# EAGLE board sensore-linea-multipli (EAGLE 9.3.0)
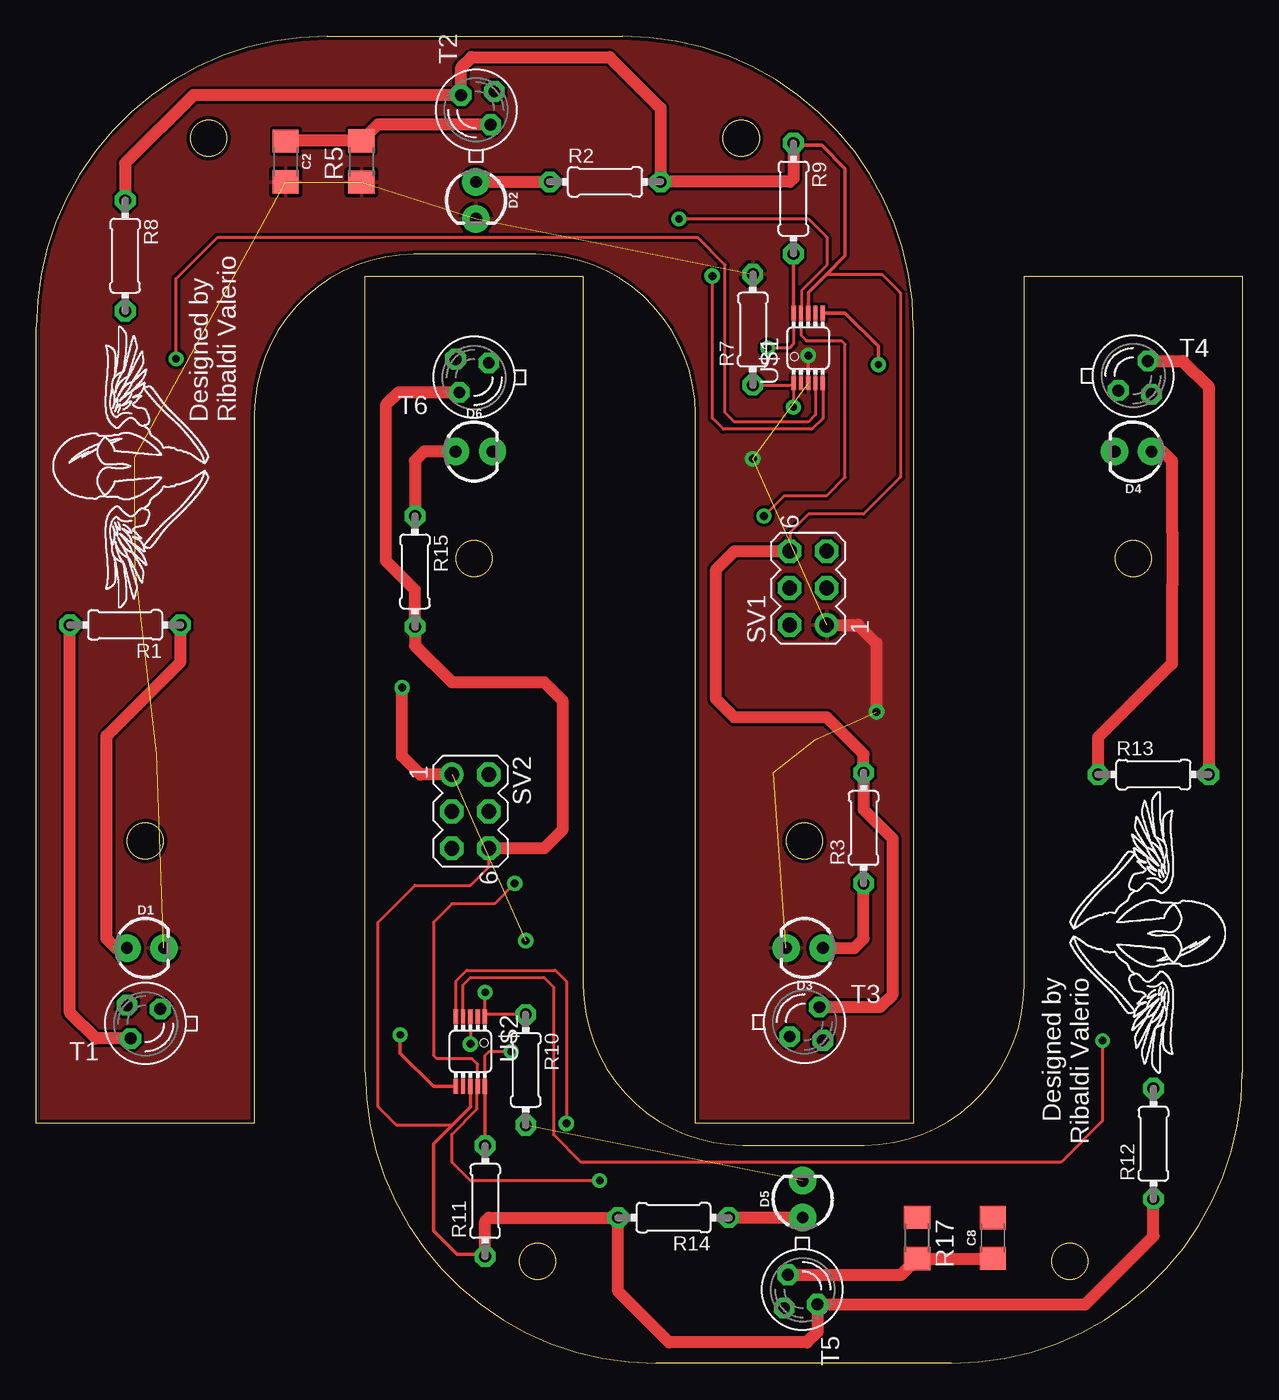
[diagram p0: board, top side]
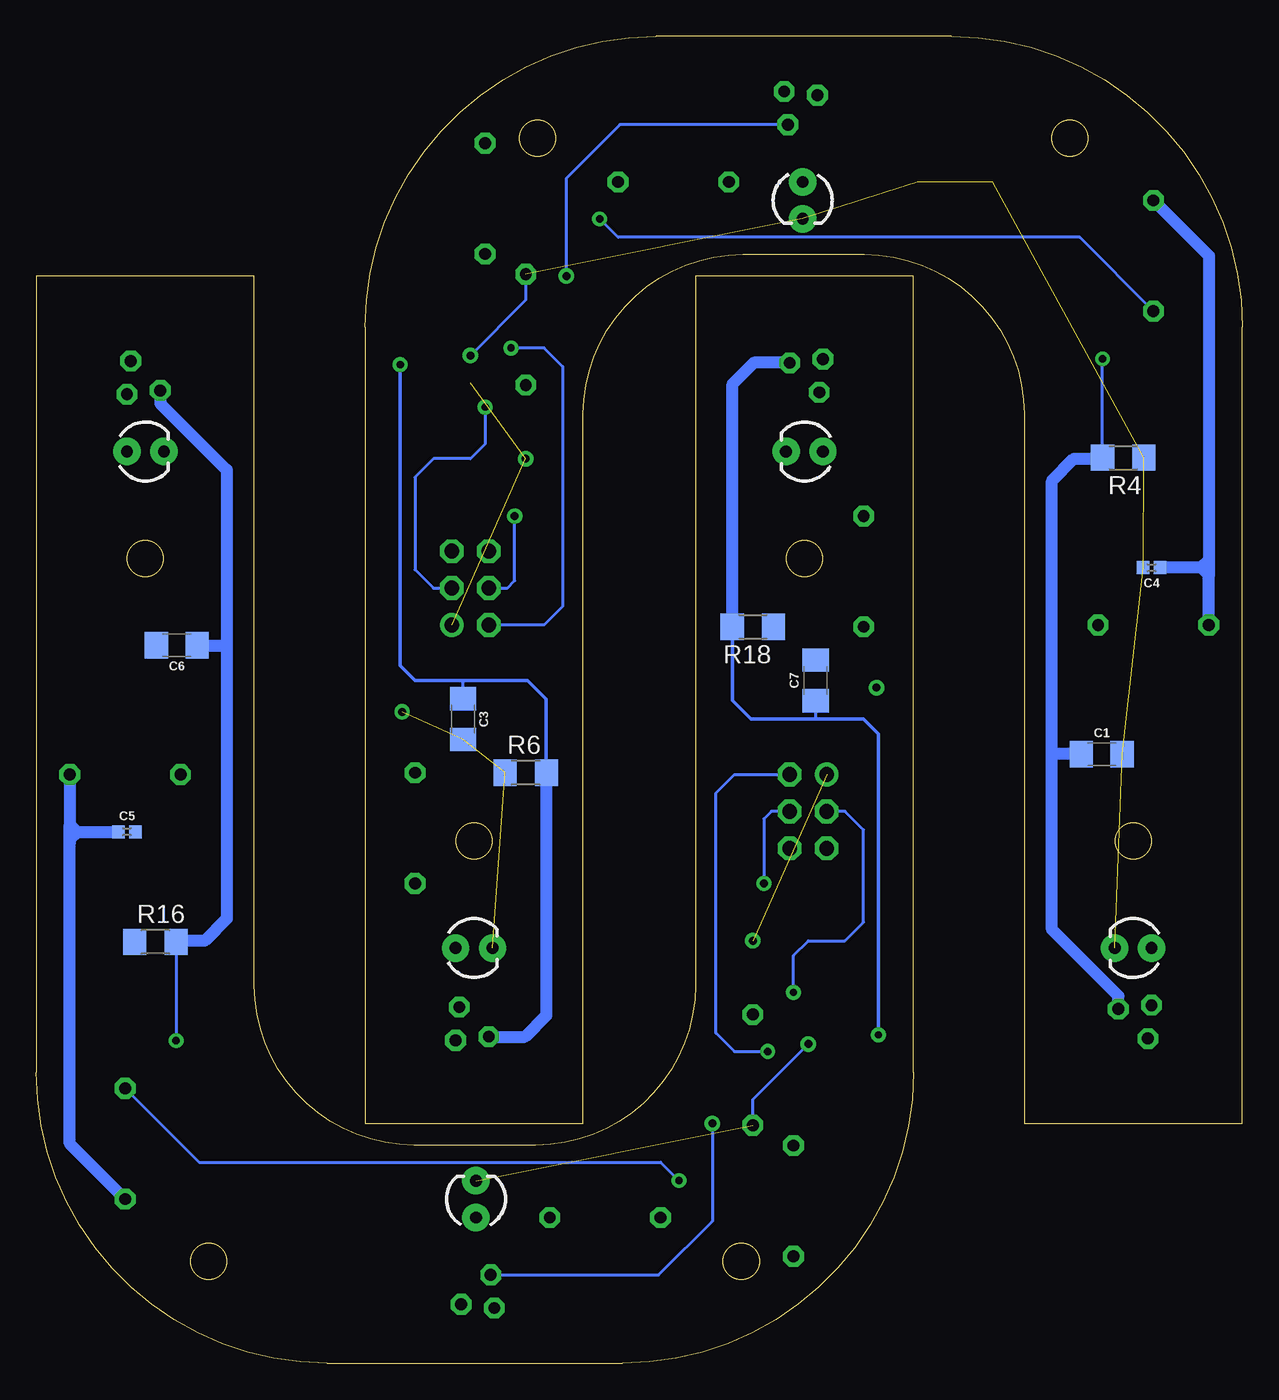
[diagram p1: board, bottom side, seen from below]

Size 82.96 x 91.27 mm. Coordinates in mm from the lower left corner, seen from the top.
Outline: 26,76.27 arc90 15,65.27 15,16.49 0,16.49 0,71.27 arc-90 20,91.27 40.34,91.27 arc-90 60.34,71.27 60.34,16.49 45.34,16.49 45.34,65.27 arc90 34.34,76.27 26,76.27
Outline: 56.96,15 arc90 67.96,26 67.96,74.78 82.96,74.78 82.96,20 arc-90 62.96,0 42.62,0 arc-90 22.62,20 22.62,74.78 37.62,74.78 37.62,26 arc90 48.62,15 56.96,15
Outline: circle at 11.86,84.27 radius 1.25
Outline: circle at 48.49,84.27 radius 1.25
Outline: circle at 7.5,35.92 radius 1.25
Outline: circle at 52.84,35.92 radius 1.25
Outline: circle at 71.1,7 radius 1.25
Outline: circle at 34.47,7 radius 1.25
Outline: circle at 75.46,55.35 radius 1.25
Outline: circle at 30.12,55.35 radius 1.25
Copper layers (1*16): Top 0.035mm / dielectric 1.5mm / Bottom 0.035mm
Design rules "SparkFun": minimum track width 8mil, minimum drill 20mil, track to track 8mil, track to pad 8mil, pad to pad 8mil, via to via 8mil, smd to smd 8mil, copper to edge 10mil, drill to drill 8mil, minimum pad ring 12mil, minimum via ring 10mil, stop-mask expansion 4mil, vias tented up to drill 25mil, thermal gap 10mil

## Footprints (pad centres in the part's own frame; a part is rotated, then mirrored left to right if it is on the bottom)
1206 = smd 1.6 x 1.8: 1 -1.4,0; 2 1.4,0
0402 = smd 0.85 x 0.9: 1 -0.58,0; 2 0.58,0
LED_3MM = drill 0.813 pad 1.88: A -1.27,0; K 1.27,0
0204/7 = drill 0.813 octagon: 1 -3.81,0; 2 3.81,0
R1206 = smd 1.6 x 1.803: 1 -1.422,0; 2 1.422,0
MA03-2 = drill 1.016: 1 -2.54,-1.27 | drill 1.016 octagon: 2 -2.54,1.27; 3 0,-1.27; 4 0,1.27; 5 2.54,-1.27; 6 2.54,1.27
BP103 = drill 0.813 octagon: B 1.27,-1.27; C 1.016,1.016; E -1.016,-1.016
MSOP10_0.5 = smd 0.3 x 1.02: 1 -1,-2.4; 2 -0.5,-2.4; 3 0,-2.4; 4 0.5,-2.4; 5 1,-2.4; 6 1,2.4; 7 0.5,2.4; 8 0,2.4; 9 -0.5,2.4; 10 -1,2.4

## Placement (x,y rotation side)
C1  1.0uF  [1206]  9.67,41.89 0 bottom
C2  1.0uF  [1206]  17.16,82.66 270 top
C3  1.0uF  [1206]  53.61,44.3 270 bottom
C4  1.0uF  [0402]  6.24,54.72 180 bottom
C5  1.0uF  [0402]  76.72,36.56 0 bottom
C6  1.0uF  [1206]  73.29,49.38 180 bottom
C7  1.0uF  [1206]  29.35,46.97 90 bottom
C8  1.0uF  [1206]  65.8,8.62 90 top
D1  [LED_3MM]  7.51,28.55 0 top
D2  [LED_3MM]  30.24,79.99 270 top
D3  [LED_3MM]  52.85,28.55 180 top
D4  [LED_3MM]  75.45,62.72 180 top
D5  [LED_3MM]  52.72,11.28 90 top
D6  [LED_3MM]  30.11,62.72 0 top
R1  180  [0204/7]  6.11,50.78 180 top
R2  180  [0204/7]  39.13,81.26 0 top
R3  180  [0204/7]  56.91,36.81 90 top
R4  10k  [R1206]  8.19,62.29 180 bottom
R5  10k  [R1206]  22.37,82.66 90 top
R6  10k  [R1206]  49.29,40.62 0 bottom
R7  10K  [0204/7]  49.29,71.1 90 top
R8  10K  [0204/7]  6.11,76.18 270 top
R9  10K  [0204/7]  52.08,80.12 270 top
R10  10K  [0204/7]  33.67,20.17 270 top
R11  10K  [0204/7]  30.87,11.16 90 top
R12  10K  [0204/7]  76.85,15.09 90 top
R13  180  [0204/7]  76.85,40.49 0 top
R14  180  [0204/7]  43.83,10.01 180 top
R15  180  [0204/7]  26.05,54.46 270 top
R16  10k  [R1206]  74.77,28.99 0 bottom
R17  10k  [R1206]  60.59,8.62 270 top
R18  10k  [R1206]  33.67,50.65 180 bottom
SV1  [MA03-2]  53.1,53.32 90 top
SV2  [MA03-2]  29.86,37.95 270 top
T1  BP103  [BP103]  7.51,23.35 180 top
T2  BP103  [BP103]  30.24,86.21 90 top
T3  BP103  [BP103]  52.85,23.47 0 top
T4  BP103  [BP103]  75.45,67.92 0 top
T5  BP103  [BP103]  52.72,5.06 270 top
T6  BP103  [BP103]  30.11,67.8 180 top
U$1  ADS1015IDGT  [MSOP10_0.5]  53.1,69.83 0 top
U$2  ADS1015IDGT  [MSOP10_0.5]  29.86,21.44 180 top

## Library data of the parts
C1-C3 C6-C8 = SparkFun-Capacitors; PROD_ID: CAP-10009
C4 C5 = SparkFun-Capacitors; PROD_ID: CAP-12417
D1-D6 = SparkFun-LED; PROD_ID: DIO-08794
R1-R6 R13-R18 = rcl; SPICEPREFIX: R
R7-R12 = resistor
SV1 SV2 = con-lstb; OC_FARNELL: unknown; OC_NEWARK: unknown
T1-T6 = opto-trans-siemens; OC_FARNELL: unknown; OC_NEWARK: unknown
U$1 U$2 = bt_adc

## Nets
ADDR: R7.1 SV1.3 U$1.1
ADDR1: R10.1 SV2.3 U$2.1
GND: C1.2 C2.2 C3.2 C4.2 D1.K D2.K D3.K R4.1 R5.1 R6.1 R7.2 SV1.1 U$1.3
GND1: C5.2 C6.2 C7.2 C8.2 D4.K D5.K D6.K R10.2 R16.1 R17.1 R18.1 SV2.1 U$2.3
N$1: D4.A R13.1
N$2: D1.A R1.1
N$3: D2.A R2.1
N$4: D3.A R3.1
N$5: D5.A R14.1
N$6: D6.A R15.1
OUT1: C1.1 R4.2 T1.E U$1.4
OUT2: C2.1 R5.2 T2.E U$1.5
OUT3: C3.1 R6.2 T3.E U$1.6
OUT4: C6.1 R16.2 T4.E U$2.4
OUT5: C8.1 R17.2 T5.E U$2.5
OUT6: C7.1 R18.2 T6.E U$2.6
SCL: R9.2 SV1.2 U$1.10
SCL1: R11.2 SV2.2 U$2.10
SDA: R8.2 SV1.4 U$1.9
SDA1: R12.2 SV2.4 U$2.9
VCC: C4.1 R1.2 R2.2 R3.2 R8.1 R9.1 SV1.6 T1.C T2.C T3.C U$1.8
VCC1: C5.1 R11.1 R12.1 R13.2 R14.2 R15.2 SV2.6 T4.C T5.C T6.C U$2.8

## Tracks (layer width: path | path; a pad name or v marks a point on that pad's centre or on a via)
ADDR  (via drill 0.51)
  Top 0.203: R7.1 51.96,67.29 U$1.1 52.1,65.78 v52.08,65.77
  Bottom 0.203: v52.08,65.77 52.08,63.23 53.1,62.21 55.64,62.21 56.91,60.94 56.91,54.59 55.64,53.32 SV1.3
ADDR1  (via drill 0.51)
  Top 0.203: R10.1 31,23.98 U$2.1 30.86,25.49 v30.87,25.51
  Bottom 0.203: v30.87,25.51 30.87,28.05 29.86,29.06 27.32,29.06 26.05,30.33 26.05,36.68 27.32,37.95 SV2.3
GND  (via drill 0.55)  (12 unrouted)
  Top 0.203: U$1.3 v53.1,69.32
  Top 0.813: SV1.1 56.53,50.78 57.8,49.51 v57.8,44.81
  Bottom 0.203: v53.1,69.32 49.29,73.13 R7.2
  other vias: 49.29,62.21
  pour Top: -0.11,16.24 15.25,16.24 15.25,18.27 15.25,65.64 arc-89 25.54,76.05 arc-1 34.56,76.05 arc-89 45.1,65.38 45.1,16.24 46.62,16.24 60.59,16.24 60.59,18.39 60.59,71.1 arc87 41.04,91.55 19.57,91.55 arc90 -0.24,71.61 -0.24,16.24
  pour Top: 22.62,74.91 37.86,74.91 37.86,73.89 37.86,25.89 arc90 48.53,15.22 56.91,15.22 arc89 67.83,26.01 67.83,74.91 83.07,74.91 83.2,74.91 83.2,20.17 arc-90 63.01,-0.15 42.81,-0.15 arc-89 22.49,19.66 22.49,74.91
GND1  (via drill 0.55)  (2 unrouted)
  Top 0.203: U$2.3 v29.86,21.95
  Top 0.813: SV2.1 26.43,40.49 25.16,41.76 v25.16,46.46
  Bottom 0.203: v29.86,21.95 33.67,18.14 R10.2
  other vias: 33.67,29.06
N$1
  Top 0.813: D4.A 77.48,62.72 78.12,62.08 78.12,57.2 78.13,57.19 78.13,53.51 78.12,53.5 78.12,48.11 73.04,43.03 R13.1
N$2
  Top 0.813: D1.A 5.48,28.55 4.84,29.19 4.84,34.07 4.83,34.08 4.83,37.76 4.84,37.78 4.84,43.16 9.92,48.24 R1.1
N$3
  Top 0.813: D2.A R2.1
N$4
  Top 0.813: R3.1 56.91,29.19 56.28,28.55 D3.A
N$5
  Top 0.813: D5.A R14.1
N$6
  Top 0.813: R15.1 26.05,62.08 26.68,62.72 D6.A
OUT1  (via drill 0.51)
  Top 0.203: U$1.4 53.6,65.25 53.1,64.75 48.02,64.75 47.39,65.38 47.39,75.54 45.48,77.45 12.46,77.45 9.61,74.6 v9.61,69.09
  Bottom 0.203: v9.61,69.09 | R4.2 v9.61,69.09
  Bottom 0.813: T1.E 8.52,25.25 13.09,29.82 13.09,41.89 | 13.09,41.89 13.09,60.69 11.57,62.21 9.69,62.21 R4.2 | C1.1 13.09,41.89
OUT2  (via drill 0.55)
  Top 0.203: U$1.5 54.1,64.99 53.35,64.24 47.26,64.24 46.5,65 v46.5,74.78
  Top 0.813: T2.E 23.48,85.2 R5.2 17.18,84.08
  Top 1.016: 17.18,84.08 C2.1
  Bottom 0.203: v46.5,74.78 46.5,81.51 42.81,85.2 T2.E
OUT3  (via drill 0.51)
  Top 0.254: U$1.6 55.63,72.23 55.64,72.24 57.93,69.96 v57.93,68.69
  Bottom 0.203: C3.1 53.61,46.97
  Bottom 0.254: R6.2 47.89,40.64 47.89,45.7 49.16,46.97 53.61,46.97 56.91,46.97 57.93,47.99 v57.93,68.69
  Bottom 0.813: 47.89,40.64 47.89,23.92 49.36,22.46 T3.E
OUT4  (via drill 0.51)
  Top 0.203: U$2.4 29.36,26.02 29.86,26.52 34.94,26.52 35.57,25.89 35.57,15.73 37.48,13.82 70.5,13.82 73.34,16.67 v73.34,22.18
  Bottom 0.203: v73.34,22.18 | R16.2 v73.34,22.18
  Bottom 0.813: T4.E 74.44,66.02 69.86,61.45 69.86,49.38 | 69.86,49.38 69.86,30.59 71.39,29.06 73.27,29.06 R16.2 | C6.1 69.86,49.38
OUT5  (via drill 0.55)
  Top 0.203: U$2.5 28.86,26.28 29.61,27.03 35.7,27.03 36.46,26.27 v36.46,16.49
  Top 0.813: T5.E 59.48,6.08 R17.2 65.78,7.19
  Top 1.016: 65.78,7.19 C8.1
  Bottom 0.203: v36.46,16.49 36.46,9.76 40.15,6.08 T5.E
OUT6  (via drill 0.51)
  Top 0.254: U$2.6 27.33,19.04 27.32,19.03 25.03,21.32 v25.03,22.59
  Bottom 0.203: C7.1 29.35,44.3
  Bottom 0.254: R18.2 35.07,50.63 35.07,45.57 33.8,44.3 29.35,44.3 26.05,44.3 25.03,43.29 v25.03,22.59
  Bottom 0.813: 35.07,50.63 35.07,67.35 33.6,68.81 T6.E
SCL  (via drill 0.51)
  Top 0.203: U$1.10 52.1,70.1 51.83,69.83 v50.31,69.83
  Top 0.254: R9.2 52.1,76.29 U$1.10
  Bottom 0.203: SV1.2 48.02,50.78 46.75,52.05 46.75,68.56 48.02,69.83 v50.31,69.83
SCL1  (via drill 0.51)
  Top 0.203: U$2.10 30.86,21.17 31.13,21.44 v32.65,21.44
  Top 0.254: R11.2 30.86,14.98 U$2.10
  Bottom 0.203: SV2.2 34.94,40.49 36.21,39.22 36.21,22.71 34.94,21.44 v32.65,21.44
SDA  (via drill 0.51, 0.55)
  Top 0.203: v50.05,58.27 51.45,59.67 54.37,59.67 55.64,60.94 55.64,70.08 55.39,70.34 52.97,70.34 52.6,70.71 U$1.9 52.65,72.27 52.65,73.8 54.37,75.52 54.37,77.45 53.1,78.72 v44.21,78.72
  Bottom 0.203: SV1.4 50.56,53.32 50.05,53.83 v50.05,58.27 | R8.2 11.19,77.45 42.94,77.45 v44.21,78.72
SDA1  (via drill 0.51, 0.55)
  Top 0.203: v32.91,33 31.51,31.6 28.59,31.6 27.32,30.33 27.32,21.19 27.57,20.93 29.99,20.93 30.36,20.56 U$2.9 30.31,19 30.31,17.48 28.59,15.75 28.59,13.82 29.86,12.55 v38.75,12.55
  Bottom 0.203: SV2.4 32.4,37.95 32.91,37.44 v32.91,33 | R12.2 71.77,13.82 40.02,13.82 v38.75,12.55
VCC
  Top 0.203: SV1.6 51.83,57.13 53.1,58.4 56.91,58.4 59.45,60.94 59.45,73.64 58.18,74.91 54.37,74.91
  Top 0.254: U$1.8 53.1,73.64 54.37,74.91 55.64,76.18 55.64,82.17 54.03,83.78 52.23,83.78 R9.1
  Top 0.813: T1.C 4.08,22.33 2.3,24.11 R1.2 | T3.C 58.03,24.49 58.92,25.38 58.92,36.07 56.91,38.08 R3.2 56.91,41.89 54.37,44.43 48.02,44.43 46.76,45.69 46.76,54.6 48.02,55.86 SV1.6 | R8.1 6.11,82.53 10.81,87.23 T2.C 29.22,89.13 29.94,89.85 39.43,89.85 42.94,86.34 R2.2 51.83,81.26 52.08,81.51 R9.1
  Bottom 0.813: R1.2 2.3,54.21 | 2.3,54.21 2.81,54.72 | 2.81,54.72 C4.1 | R8.1 2.3,76.18 2.3,55.48 2.3,55.22 | 2.3,55.22 2.3,54.21 | 2.3,55.22 2.81,54.72
VCC1
  Top 0.203: SV2.6 31.13,34.14 29.86,32.87 26.05,32.87 23.51,30.33 23.51,17.63 24.78,16.36 28.59,16.36
  Top 0.254: U$2.8 29.86,17.63 28.59,16.36 27.32,15.09 27.32,9.1 28.93,7.49 30.73,7.49 R11.1
  Top 0.813: T4.C 78.88,68.94 80.66,67.16 R13.2 | T6.C 24.93,66.78 24.04,65.89 24.04,55.2 26.05,53.19 R15.2 26.05,49.38 28.59,46.84 34.94,46.84 36.2,45.59 36.2,36.67 34.94,35.41 SV2.6 | R12.1 76.85,8.74 72.15,4.04 T5.C 53.73,2.14 53.02,1.42 43.53,1.42 40.02,4.93 R14.2 31.13,10.01 30.87,9.76 R11.1
  Bottom 0.813: R13.2 80.66,37.06 | 80.66,37.06 80.15,36.56 | 80.15,36.56 C5.1 | R12.1 80.66,15.09 80.66,35.79 80.66,36.05 | 80.66,36.05 80.66,37.06 | 80.66,36.05 80.15,36.56

## Text on the board
tNames: Designed by / Ribaldi Valerio | Designed by / Ribaldi Valerio